# Altium PCB MCD V1.00 R.00.PcbDoc (part 3 of 3)
Units mm, origin at the board's own origin, x right, y up, seen from the top; angles counter-clockwise.
Board outline 257.5 x 162.5 mm, 2 copper layers (Top Layer, Bottom Layer); 260 components, 165 nets, 831 pads, 233 vias.
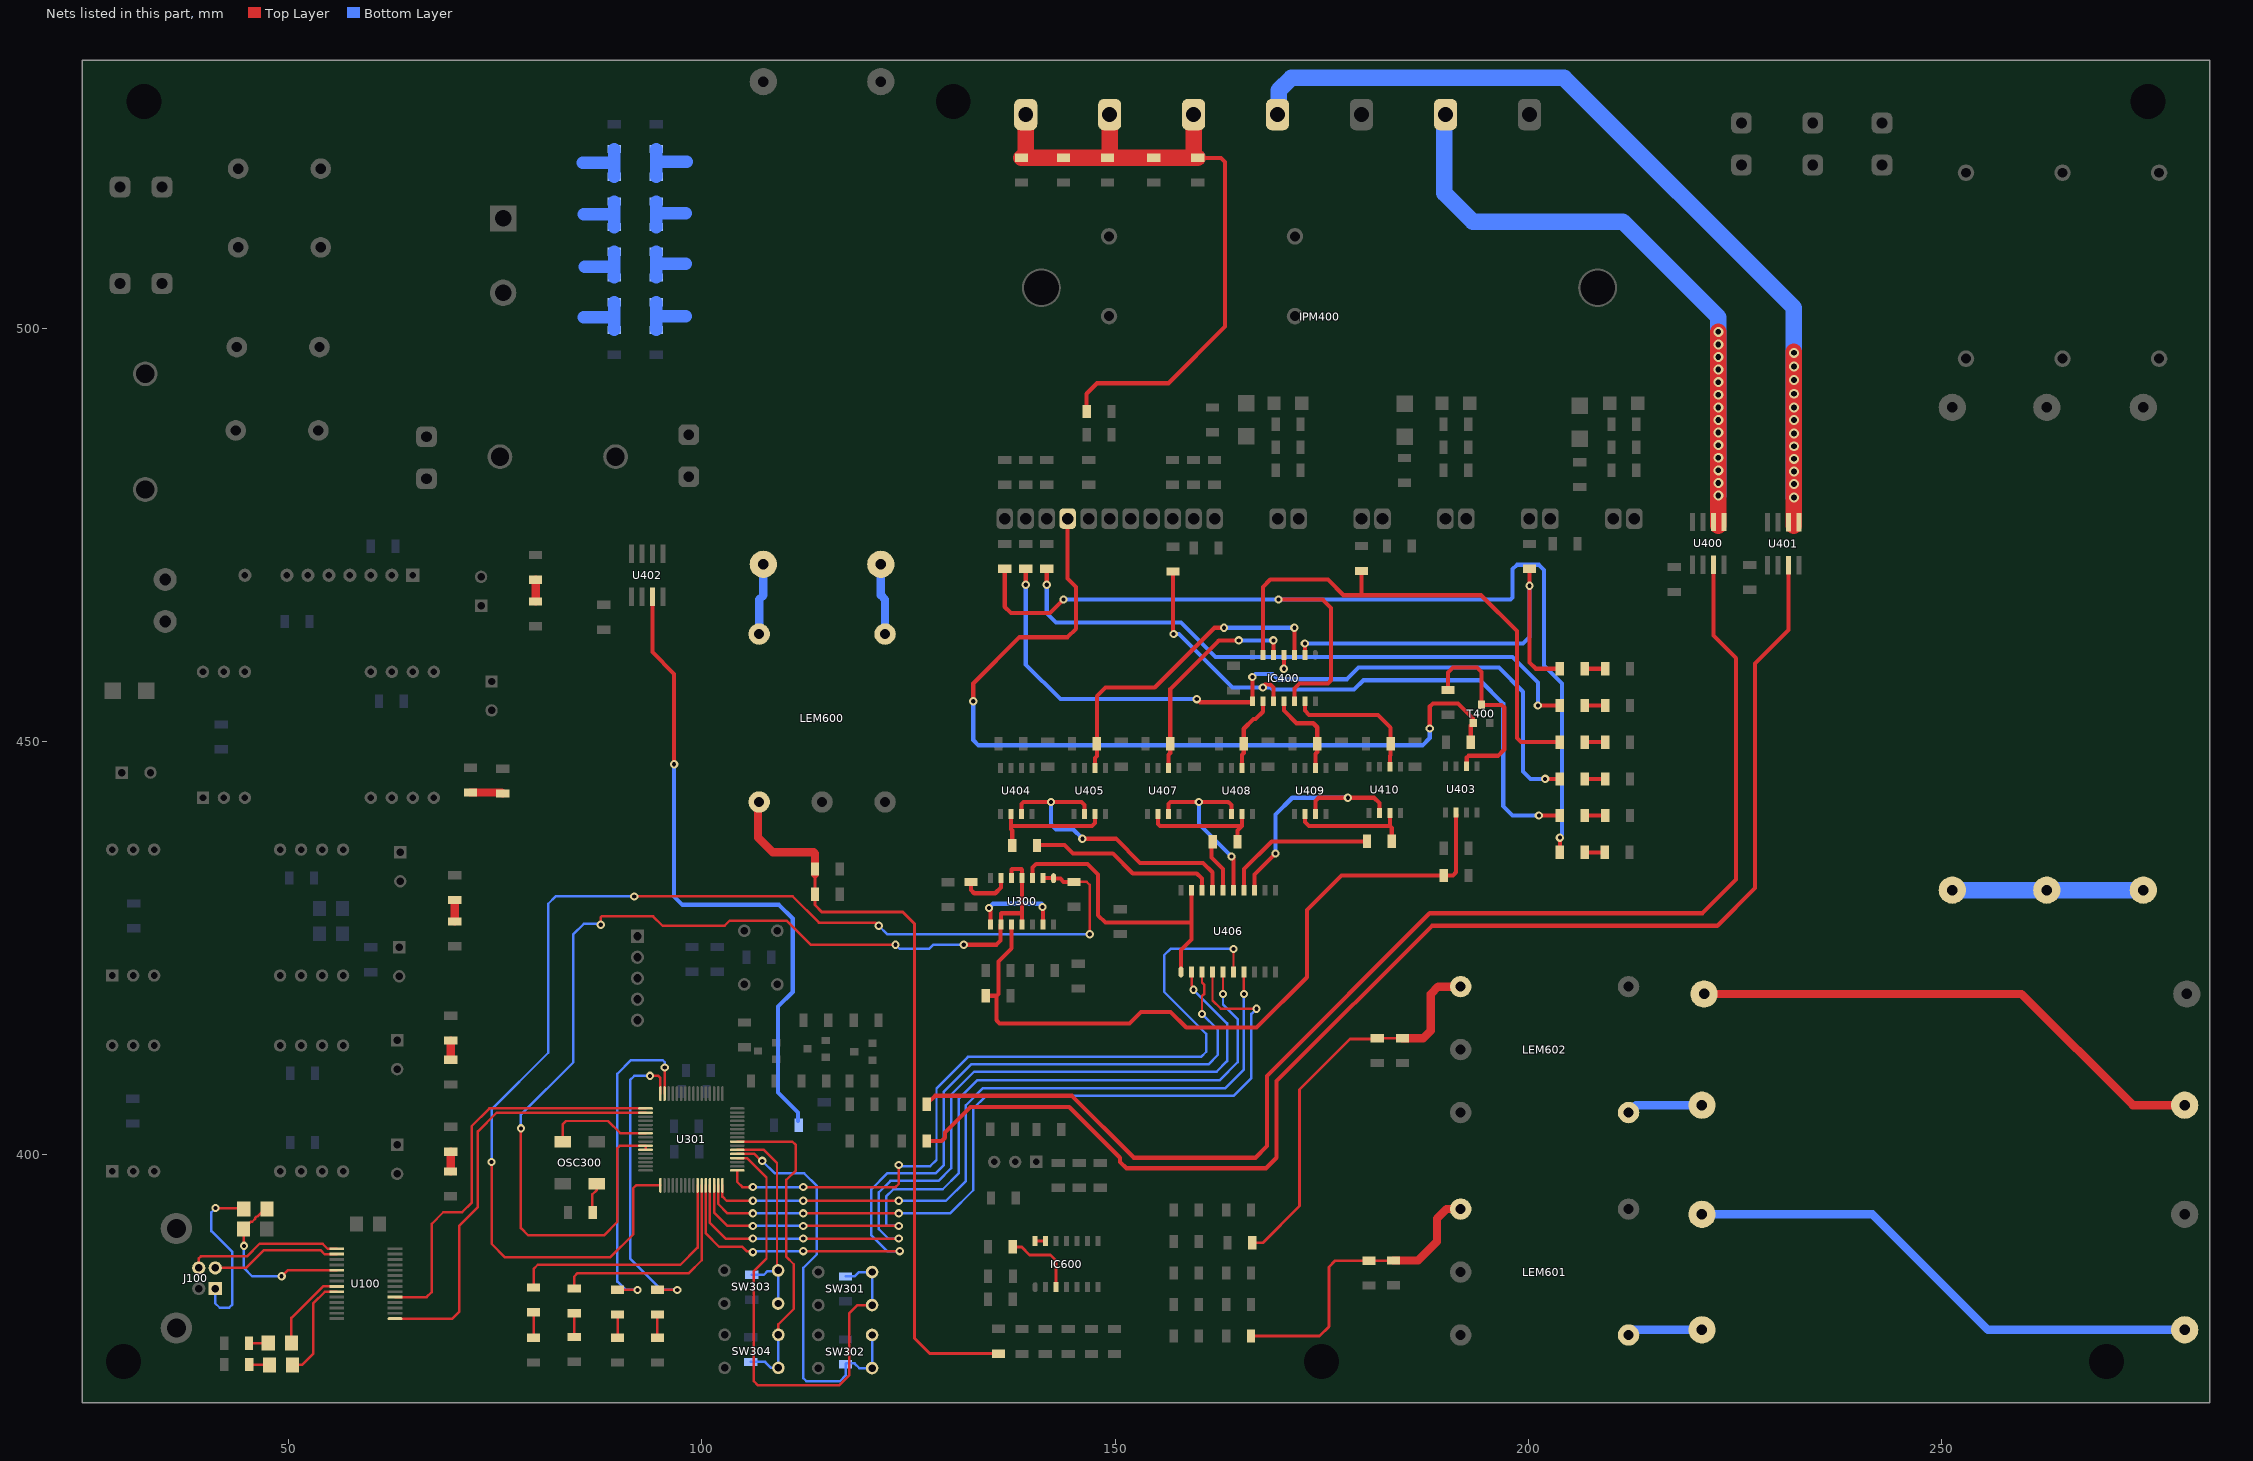
[diagram p3: the nets of this part, all layers, seen from the top]

## Via types
v1: diameter 1, hole 0.5, Top Layer to Bottom Layer, 192 vias
v2: diameter 1.2, hole 0.7, Top Layer to Bottom Layer, 26 vias
v3: diameter 1.27, hole 0.711, Top Layer to Bottom Layer, 15 vias

## Nets (pads, with @x,y where several pads share a name; then routed paths per layer and width w, separated by ;. In a path a pad name is that pad's centre, name@x,y a point inside that pad or via, vN(x,y) a via of type N, cw(c..) or ccw(c..) an arc to the next point about the centre after c; other vN are vias at no path point) (continued)
NetIC400_2: IC400.2 R417.1 R418.1 | length 50.4
  Top Layer w0.5: IC400.2@172.974,460.514 v1(172.974,461.899) ; R417.1@200.152,470.94 v1(200.152,468.884) 200.152,459.613 200.914,458.851 R418.1@203.835,458.851
  Bottom Layer w0.5: v1(172.974,461.899) 199.39,461.899 200.152,462.661 v1(200.152,468.884)
NetIC400_3: IC400.3 R419.1 U405.6 | length 39.4
  Top Layer w0.5: U405.6@147.57,446.853 147.57,448.052 147.8,448.282 R419.1@147.8,449.768 147.8,455.521 148.844,456.565 154.813,456.565 162.052,463.804 v1(163.195,463.804) ; IC400.3@171.704,460.514 v1(171.704,463.804)
  Bottom Layer w0.5: v1(163.195,463.804) v1(171.704,463.804)
NetIC400_4: IC400.4 R420.1 R421.1 | length 76.8
  Top Layer w0.5: v1(141.732,469.011) R420.1@141.732,470.94 ; v1(170.434,458.851) IC400.4@170.434,460.514 ; v1(201.168,454.406) R421.1@203.835,454.406
  Bottom Layer w0.5: v1(141.732,469.011) 141.732,465.582 142.875,464.439 157.988,464.439 162.179,460.248 170.434,460.248 ; v1(170.434,458.851) 170.434,460.248 ; v1(201.168,454.406) 201.168,457.2 198.12,460.248 170.434,460.248
NetIC400_5: IC400.5 R422.1 U407.6 | length 26.3
  Top Layer w0.5: U407.6@156.46,446.853 156.46,448.433 156.69,448.663 R422.1@156.69,449.768 156.69,456.41 162.56,462.28 v1(164.973,462.28) ; IC400.5@169.164,460.514 v1(169.164,462.28)
  Bottom Layer w0.5: v1(164.973,462.28) v1(169.164,462.28)
NetIC400_6: IC400.6 R424.1 R425.1 | length 63.3
  Top Layer w0.5: IC400.6@167.894,460.514 167.894,468.757 168.783,469.646 175.768,469.646 177.673,467.741 179.705,467.741 ; R424.1@179.832,470.686 179.832,467.868 179.705,467.741 ; R425.1@203.835,449.961 199.136,449.961 198.628,450.469 198.628,463.423 194.31,467.741 179.705,467.741
NetIC400_8: IC400.8 R427.1 R428.1 | length 93.3
  Top Layer w0.5: v1(139.192,469.011) R427.1@139.192,470.94 ; v1(159.893,455.168) 160.274,454.787 166.497,454.787 IC400.8@166.624,454.914 v1(166.624,457.835) ; v1(202.057,445.516) R428.1@203.835,445.516
  Bottom Layer w0.5: v1(139.192,469.011) 139.192,459.359 143.383,455.168 v1(159.893,455.168) ; v1(166.624,457.835) 167.005,458.216 169.037,458.216 169.672,457.581 178.054,457.581 179.451,458.978 196.469,458.978 199.39,456.057 199.39,446.405 200.279,445.516 v1(202.057,445.516)
NetIC400_9: IC400.9 R426.1 U408.6 | length 9.3
  Top Layer w0.5: U408.6@165.35,446.853 165.35,448.433 165.58,448.663 R426.1@165.58,449.768 165.58,451.584 166.751,452.755 167.005,452.755 167.894,453.644 IC400.9@167.894,454.914
NetIC400_10: IC400.10 R431.1 R432.1 | length 75
  Top Layer w0.5: R431.1@157.032,470.603 157.032,463.109 v1(157.099,463.042) ; v1(167.894,456.565) 167.894,456.692 168.148,456.946 168.783,456.946 169.164,456.565 IC400.10@169.164,454.914 ; v1(201.295,441.071) R432.1@203.835,441.071
  Bottom Layer w0.5: v1(157.099,463.042) 157.734,463.042 164.211,456.565 v1(167.894,456.565) 168.783,456.565 169.037,456.311 178.943,456.311 180.086,457.454 194.183,457.454 196.977,454.66 196.977,442.214 198.12,441.071 v1(201.295,441.071)
NetIC400_11: IC400.11 R429.1 U409.6 | length 11
  Top Layer w0.5: IC400.11@170.434,454.914 170.434,453.771 171.958,452.247 173.99,452.247 174.47,451.767 R429.1@174.47,449.768 174.47,448.79 174.24,448.56 U409.6@174.24,446.853
NetIC400_12: IC400.12 R434.1 R435.1 | length 132
  Top Layer w0.5: R434.1@136.652,470.94 136.652,466.344 137.414,465.582 142.113,465.582 v1(143.764,467.233) ; v1(169.799,467.233) 175.133,467.233 176.149,466.217 176.149,457.454 175.768,457.073 172.339,457.073 171.704,456.438 IC400.12@171.704,454.914 ; R435.1@203.835,436.626 v1(203.835,438.404)
  Bottom Layer w0.5: v1(143.764,467.233) v1(169.799,467.233) 197.866,467.233 198.12,467.487 198.12,470.916 198.628,471.424 201.295,471.424 201.93,470.789 201.93,459.232 204.089,457.073 204.089,438.785 203.835,438.531 v1(203.835,438.404)
NetIC400_13: IC400.13 R433.1 U410.6 | length 17.2
  Top Layer w0.5: IC400.13@172.974,454.914 172.974,453.771 173.482,453.263 181.809,453.263 183.36,451.711 R433.1@183.36,449.768 183.36,448.409 183.261,448.31 183.261,446.984 U410.6@183.257,446.98
NetIC600_3: IC600.3 R608.1 | length 9.1
  Top Layer w0.35: R608.1@137.64,388.887 138.671,388.887 139.659,387.899 142.199,387.899 142.875,387.223 IC600.3@142.875,383.999
NetIC600_13: IC600.13 IC600.14 | length 1.3
  Top Layer w0.35: IC600.14@140.335,389.599 IC600.13@141.605,389.599
NetIPM400_18: IPM400.18 R411.1 T400.1 | length 104.6
  Top Layer w0.5: v1(132.842,454.914) 132.842,457.073 138.43,462.661 144.272,462.661 145.288,463.677 145.288,468.757 144.272,469.773 IPM400.18@144.272,477.012 ; v1(188.087,451.612) 188.087,454.279 188.468,454.66 191.516,454.66 193.335,452.841 T400.1@193.335,452.269 193.057,451.991 R411.1@193.057,449.96
  Bottom Layer w0.5: v1(132.842,454.914) 132.842,450.215 133.477,449.58 187.198,449.58 188.087,450.469 v1(188.087,451.612)
NetIPM400_23: IPM400.23 U400.1 U400.2 | length 94
  Top Layer w2: 223.012,476.123 v2(223.012,479.806) v2(223.012,481.33) v2(223.012,482.854) v2(223.012,484.378) v2(223.012,485.902) v2(223.012,487.426) v2(223.012,488.95) v2(223.012,490.474) v2(223.012,491.998) v2(223.012,493.522) v2(223.012,495.046) v2(223.012,496.57) v2(223.012,498.094) v2(223.012,499.618)
  Bottom Layer w2: IPM400.23@189.992,525.907 189.865,525.78 189.865,516.382 193.294,512.953 211.455,512.953 223.012,501.396 v2(223.012,499.618) v2(223.012,498.094) v2(223.012,496.57) v2(223.012,495.046) v2(223.012,493.522) v2(223.012,491.998) v2(223.012,490.474) v2(223.012,488.95) v2(223.012,487.426) v2(223.012,485.902) v2(223.012,484.378) v2(223.012,482.854) v2(223.012,481.33) v2(223.012,479.806)
NetIPM400_25: IPM400.25 U401.1 U401.2 | length 121.6
  Top Layer w2: 232.156,476.123 v2(232.156,479.552) v2(232.156,481.203) v2(232.156,482.727) v2(232.156,484.251) v2(232.156,485.775) v2(232.156,487.299) v2(232.156,488.95) v2(232.156,490.474) v2(232.156,492.125) v2(232.156,493.776) v2(232.156,495.427) v2(232.156,497.078) v2@232.156,497.205
  Bottom Layer w2: IPM400.25@169.672,525.907 169.799,526.034 169.799,528.828 171.323,530.352 204.343,530.352 232.156,502.539 v2(232.156,497.078) v2(232.156,495.427) v2(232.156,493.776) v2(232.156,492.125) v2(232.156,490.474) v2(232.156,488.95) v2(232.156,487.299) v2(232.156,485.775) v2(232.156,484.251) v2(232.156,482.727) v2(232.156,481.203) v2(232.156,479.552)
NetIPM400_26: IPM400.26 IPM400.27 IPM400.28 R403.2 R406.2 R407.2 R408.2 R409.2 R410.2 | length 83.3
  Top Layer w0.5: R403.2@146.582,489.966 146.558,489.99 146.558,492.125 147.828,493.395 156.464,493.395 163.322,500.253 163.322,520.192 162.838,520.676 R409.2@160.02,520.676
  Top Layer w2: IPM400.28@139.192,525.907 139.192,521.184 R410.2@138.684,520.676 R406.2@143.764,520.676 R407.2@149.098,520.676 ; IPM400.27@149.352,525.907 149.352,520.93 R407.2@149.098,520.676 ; IPM400.26@159.512,525.907 159.512,521.184 R409.2@160.02,520.676 R408.2@154.686,520.676 R407.2@149.098,520.676
NetJ100_1: J100.1 R100.2 | length 20.7
  Top Layer w0.3: v1(41.148,393.573) 44.447,393.573 R100.2@44.574,393.446
  Bottom Layer w0.3: J100.1@41.116,383.834 41.116,382.048 41.656,381.508 42.799,381.508 43.18,381.889 43.18,388.239 40.64,390.779 40.64,393.065 v1(41.148,393.573)
NetJ100_2: J100.2 U100.16 | length 15.8
  Top Layer w0.3: J100.2@41.116,386.334 44.831,386.334 46.99,388.493 53.848,388.493 54.356,387.985 55.805,387.985 U100.16@55.819,387.999
NetJ100_3: J100.3 U100.15 | length 19
  Top Layer w0.3: J100.3@39.116,386.334 39.116,387.477 39.37,387.731 41.656,387.731 ; 41.783,387.731 41.656,387.731 ; U100.15@55.819,388.649 54.708,388.649 54.102,389.255 46.482,389.255 44.958,387.731 41.656,387.731
NetLED500_A: LED500.A R500.1 | length 2.3
  Top Layer w1: LED500.A@69.617,411.533 R500.1@69.617,413.843
NetLED501_K: LED501.K R501.1 | length 2.4
  Top Layer w1: R501.1@69.596,397.994 69.617,398.015 LED501.K@69.617,400.405
NetLED502_A: LED502.A R502.2 | length 2.6
  Top Layer w1: LED502.A@70.109,428.249 R502.2@70.109,430.861
NetLED503_A: LED503.A R503.2 | length 4
  Top Layer w1: R503.2@72.009,443.865 75.787,443.865 LED503.A@75.914,443.738
NetLED504_A: LED504.A R504.2 | length 2.6
  Top Layer w1: R504.2@79.883,466.979 LED504.A@79.883,469.615
NetLEM600_1: LEM600.1 R601.1 | length 8.6
  Bottom Layer w1: R601.1@121.661,471.478 121.661,467.746 122.174,467.233 LEM600.1@122.174,463.042
NetLEM600_2: LEM600.2 R606.1 | length 8.6
  Bottom Layer w1: LEM600.2@106.934,463.042 106.934,467.233 107.437,467.736 R606.1@107.437,471.478
NetLEM600_3: LEM600.3 R603.1 R607.1 R627.1 | length 93
  Top Layer w0.35: R607.1@113.689,434.594 R627.1@113.689,431.546 113.689,430.252 114.554,429.387 124.333,429.387 125.73,427.99 125.73,377.825 127.598,375.957 R603.1@135.886,375.957
  Top Layer w1: LEM600.3@106.934,442.722 106.807,442.595 106.807,438.404 108.585,436.626 113.538,436.626 113.689,436.475 R607.1@113.689,433.959
NetLEM601_1: LEM601.1 R611.1 | length 9.1
  Bottom Layer w1: LEM601.1@212.149,378.211 212.784,378.846 R611.1@221.034,378.846
NetLEM601_3: LEM601.3 R612.1 R615.1 R628.1 | length 37.6
  Top Layer w0.35: R612.1@166.469,378.092 174.765,378.092 175.895,379.222 175.895,386.461 176.633,387.199 R628.1@180.721,387.199 183.672,387.199 R615.1@183.701,387.228
  Top Layer w1: R615.1@183.701,387.228 186.695,387.228 188.976,389.509 188.976,392.303 190.124,393.451 LEM601.3@191.829,393.451
NetLEM602_1: LEM602.1 R620.1 | length 9.3
  Bottom Layer w1: LEM602.1@212.149,405.135 213.038,406.024 R620.1@221.034,406.024
NetLEM602_3: LEM602.3 R621.1 R624.1 R629.1 | length 48.9
  Top Layer w0.35: R621.1@166.6,389.382 167.894,389.382 172.339,393.827 172.339,407.924 178.435,414.02 181.634,414.02 R629.1@181.737,414.123 R624.1@184.785,414.123
  Top Layer w1: R624.1@184.785,414.123 187.301,414.123 188.214,415.036 188.214,419.481 189.108,420.375 LEM602.3@191.829,420.375
NetOSC300_1: OSC300.1 R301.2 | length 3.7
  Top Layer w0.3: R301.2@86.793,393.053 86.741,393.105 86.741,395.224 87.294,395.777 OSC300.1@87.294,396.527
NetOSC300_3: OSC300.3 U301.39 | length 12.9
  Top Layer w0.3: OSC300.3@83.167,401.607 83.185,401.625 83.185,403.733 83.566,404.114 88.646,404.114 90.132,402.628 U301.39@93.184,402.628
NetPWM_UN_A: PWM_UN.A R421.2 | length 2.5
  Top Layer w0.5: R421.2@206.835,454.406 PWM_UN.A@209.32,454.406
NetPWM_UP_A: PWM_UP.A R418.2 | length 2.5
  Top Layer w0.5: R418.2@206.835,458.851 PWM_UP.A@209.32,458.851
NetPWM_VN_A: PWM_VN.A R428.2 | length 2.5
  Top Layer w0.5: R428.2@206.835,445.516 PWM_VN.A@209.32,445.516
NetPWM_VP_A: PWM_VP.A R425.2 | length 2.5
  Top Layer w0.5: R425.2@206.835,449.961 PWM_VP.A@209.32,449.961
NetPWM_WN_A: PWM_WN.A R435.2 | length 2.4
  Top Layer w0.5: R435.2@206.835,436.626 PWM_WN.A@209.272,436.626
NetPWM_WP_A: PWM_WP.A R432.2 | length 2.3
  Top Layer w0.5: R432.2@207.01,441.071 PWM_WP.A@209.32,441.071
NetR100_1: R100.1 R103.2 U100.19 | length 20.6
  Top Layer w0.3: v1(44.577,389.001) 44.577,391.002 R103.2@44.539,391.04 45.421,391.922 45.593,391.922 45.974,392.303 45.974,392.43 46.101,392.557 46.228,392.557 47.117,393.446 R100.1@47.374,393.446 ; v1(49.149,385.318) 49.911,386.08 55.788,386.08 U100.19@55.819,386.049
  Bottom Layer w0.3: v1(44.577,389.001) 44.577,386.334 45.593,385.318 v1(49.149,385.318)
NetR101_1: R101.1 U100.23 | length 12.6
  Top Layer w0.3: R101.1@50.465,374.587 51.626,374.587 52.959,375.92 52.959,382.016 54.392,383.449 U100.23@55.819,383.449
NetR101_2: R101.2 TX_LED100.K | length 2.3
  Top Layer w0.3: TX_LED100.K@45.323,374.603 47.649,374.603 R101.2@47.665,374.587
NetR102_1: R102.1 U100.22 | length 10.1
  Top Layer w0.3: R102.1@50.338,377.254 50.338,380.284 54.153,384.099 U100.22@55.819,384.099
NetR102_2: R102.2 RX_LED100.K | length 2.4
  Top Layer w0.3: RX_LED100.K@45.196,377.216 47.5,377.216 R102.2@47.538,377.254
NetR303_2: R303.2 R413.1 U300.10 U403.6 | length 90.2
  Top Layer w0.5: R303.2@134.36,419.265 135.674,419.265 ; 135.89,419.481 135.674,419.265 ; 135.89,419.608 135.89,423.418 137.484,425.012 U300.10@137.484,427.9 ; U403.6@191.298,441.127 191.262,441.091 191.262,434.213 190.881,433.832 R413.1@189.786,433.832 177.419,433.832 173.228,429.641 173.228,421.513 167.132,415.417 158.623,415.417 156.718,417.322 153.162,417.322 151.765,415.925 136.017,415.925 135.636,416.306 135.636,419.227 135.674,419.265
NetR305_1: R305.1 U300.1 U300.2 U301.49 | length 151.7
  Top Layer w0.3: v1(74.549,399.161) 74.549,389.255 76.2,387.604 88.9,387.604 91.694,390.398 91.694,395.986 92.036,396.328 U301.49@94.984,396.328 ; v1(91.821,431.292) 110.998,431.292 114.173,428.117 121.031,428.117 v1(121.412,427.736) ; R305.1@145.034,433.046 146.582,433.046 146.939,432.689 v1(146.939,426.72)
  Top Layer w0.5: U300.2@141.294,433.5 U300.1@142.564,433.5 142.613,433.451 143.383,433.451 143.788,433.046 R305.1@145.034,433.046
  Bottom Layer w0.3: v1(74.549,399.161) 74.549,405.511 81.407,412.369 81.407,430.403 82.296,431.292 v1(91.821,431.292) ; v1(121.412,427.736) 122.428,426.72 v1(146.939,426.72)
NetR306_2: R306.2 SW301.2 U301.4 | length 60.1
  Top Layer w0.3: U301.4@104.284,399.628 105.451,399.628 107.823,397.256 107.823,387.477 106.299,385.953 106.299,372.618 106.807,372.11 116.586,372.11 117.856,373.38 117.856,380.873 118.819,381.836 SW301.2@120.597,381.836
  Bottom Layer w0.3: R306.2@117.399,385.304 118.477,385.304 118.999,385.826 120.587,385.826 SW301.2@120.597,385.836 SW301.2@120.597,381.836
NetR307_2: R307.2 SW302.2 U301.5 | length 49.6
  Top Layer w0.3: U301.5@104.284,400.128 106.348,400.128 107.188,399.288 v1(107.315,399.288)
  Bottom Layer w0.3: v1(107.315,399.288) 108.839,397.764 112.395,397.764 113.919,396.24 113.919,387.985 112.268,386.334 112.268,372.999 112.649,372.618 116.713,372.618 117.399,373.304 R307.2@117.399,374.684 117.492,374.777 118.491,374.777 119.052,374.216 SW302.2@120.597,374.216 SW302.2@120.597,378.216
NetR308_2: R308.2 SW303.2 U301.6 | length 26
  Top Layer w0.3: U301.6@104.284,400.628 107.499,400.628 109.093,399.034 109.093,386.163 SW303.2@109.23,386.026
  Bottom Layer w0.3: R308.2@106.032,385.494 107.491,385.494 107.95,385.953 109.157,385.953 SW303.2@109.23,386.026 SW303.2@109.23,382.026
NetR309_2: R309.2 SW304.2 U301.8 | length 39.5
  Top Layer w0.3: U301.8@104.284,401.628 110.944,401.628 111.379,401.193 111.379,398.145 110.236,397.002 110.236,387.667 111.125,386.779 111.125,381.381 109.262,379.518 SW304.2@109.262,378.24
  Bottom Layer w0.3: R309.2@105.918,374.952 107.648,374.952 108.36,374.24 SW304.2@109.262,374.24 SW304.2@109.262,378.24
NetR310_1: R310.1 UL_300.A | length 2.8
  Top Layer w0.3: UL_300.A@94.624,377.888 R310.1@94.624,380.706
NetR310_2: R310.2 U301.32 | length 37.2
  Top Layer w0.3: v1(93.726,409.575) 94.742,409.575 94.984,409.333 U301.32@94.984,407.428 ; R310.2@94.624,383.706 94.663,383.667 v1(97.028,383.667)
  Bottom Layer w0.3: v1(93.726,409.575) 91.821,409.575 91.313,409.067 91.313,387.477 95.123,383.667 v1(97.028,383.667)
NetR311_1: R311.1 UL_301.A | length 2.8
  Top Layer w0.3: UL_301.A@89.798,377.888 R311.1@89.798,380.706
NetR311_2: R311.2 U301.31 | length 40.7
  Top Layer w0.3: R311.2@89.798,383.706 89.837,383.667 v1(92.202,383.667) ; U301.31@95.484,407.428 95.484,410.571 v1(95.504,410.591)
  Bottom Layer w0.3: v1(92.202,383.667) 90.805,383.667 89.789,384.683 89.789,409.829 91.44,411.48 95.25,411.48 95.504,411.226 v1(95.504,410.591)
NetR312_1: R312.1 UL_302.A | length 2.9
  Top Layer w0.3: UL_302.A@84.559,377.967 R312.1@84.559,380.833
NetR312_2: R312.2 U301.59 | length 26.8
  Top Layer w0.3: R312.2@84.559,383.833 84.559,385.295 84.963,385.699 98.425,385.699 99.984,387.258 U301.59@99.984,396.328
NetR313_1: R313.1 UL_303.A | length 3.1
  Top Layer w0.3: UL_303.A@79.638,377.888 R313.1@79.638,380.96
NetR313_2: R313.2 U301.58 | length 30.7
  Top Layer w0.3: R313.2@79.638,383.96 79.638,386.216 80.137,386.715 97.409,386.715 99.484,388.79 U301.58@99.484,396.328
NetR314_2: R314.2 U300.6 | length 6.2
  Top Layer w0.5: R314.2@132.588,433.046 132.588,432.054 132.969,431.673 135.509,431.673 136.214,432.378 U300.6@136.214,433.5
NetR400_1: R400.1 U400.7 | length 159.7
  Top Layer w0.5: R400.1@127.206,406.146 128.222,407.162 144.78,407.162 152.273,399.669 167.005,399.669 168.402,401.066 168.402,409.575 188.087,429.26 221.107,429.26 225.171,433.324 225.171,460.121 222.422,462.87 U400.7@222.422,471.421
NetR401_1: R401.1 U401.7 | length 165.9
  Top Layer w0.5: R401.1@127.206,401.701 129.032,401.701 129.413,402.082 129.413,402.717 132.524,405.828 144.463,405.828 150.622,399.669 150.622,399.161 151.384,398.399 168.275,398.399 169.545,399.669 169.545,408.94 188.341,427.736 222.885,427.736 227.457,432.308 227.457,459.486 231.521,463.55 U401.7@231.521,471.364
NetR412_1: R412.1 T400.3 U403.2 | length 24.9
  Top Layer w0.5: R412.1@190.287,456.286 190.287,458.384 190.881,458.978 193.802,458.978 194.351,458.429 T400.3@194.351,454.479 196.777,454.479 197.104,454.152 197.104,449.072 196.342,448.31 192.786,448.31 192.568,448.092 U403.2@192.568,446.727
NetR414_1: R414.1 U402.7 | length 79.1
  Top Layer w0.5: U402.7@94.012,467.559 94.012,460.851 96.647,458.216 v1(96.647,447.294)
  Bottom Layer w0.5: v1(96.647,447.294) 96.647,431.292 97.663,430.276 109.347,430.276 110.998,428.625 110.998,419.735 109.22,417.957 109.22,407.543 111.633,405.13 R414.1@111.633,404.114
NetR416_1: R416.1 U406.18 | length 23.1
  Top Layer w0.5: R416.1@140.561,437.449 140.627,437.515 143.891,437.515 144.907,436.499 149.733,436.499 152.146,434.086 159.893,434.086 160.528,433.451 U406.18@160.528,432.048
NetR416_2: R416.2 U404.2 U405.3 | length 15.3
  Top Layer w0.5: U404.2@137.41,441.253 137.41,439.801 ; R416.2@137.561,437.449 137.561,439.273 137.41,439.424 137.41,439.801 ; U405.3@147.57,441.253 147.57,440.178 147.193,439.801 137.41,439.801
NetR423_1: R423.1 U406.16 | length 6.5
  Top Layer w0.5: R423.1@161.822,437.896 161.671,437.745 161.671,435.991 163.068,434.594 U406.16@163.068,432.048
NetR423_2: R423.2 U407.2 U408.3 | length 15
  Top Layer w0.5: U407.2@155.19,441.253 155.19,440.059 155.452,439.797 165.35,439.797 ; R423.2@164.822,437.896 164.822,439.269 165.35,439.797 ; U408.3@165.35,441.253 165.35,439.797
NetR430_1: R430.1 U406.14 | length 18.8
  Top Layer w0.5: U406.14@165.608,432.048 165.608,434.594 168.971,437.957 R430.1@180.487,437.957
NetR430_2: R430.2 U409.2 U410.3 | length 15
  Top Layer w0.5: U409.2@172.97,441.253 172.97,440.313 173.478,439.805 183.257,439.805 ; U410.3@183.257,441.38 183.257,439.805 ; R430.2@183.487,437.957 183.487,439.575 183.257,439.805
NetR436_2: R436.2 R437.2 R438.2 | length 23.1
  Bottom Layer w2: R436.2@251.333,432.054 R437.2@262.763,432.054 R438.2@274.447,432.054
NetR610_1: R610.1 R611.2 | length 64.2
  Bottom Layer w1: R610.1@221.034,392.816 241.676,392.816 255.646,378.846 R611.2@279.454,378.846
NetR619_1: R619.1 R620.2 | length 63.7
  Top Layer w1: R619.1@221.288,419.486 259.71,419.486 273.172,406.024 R620.2@279.454,406.024
NetR700_2: R700.2 R702.1 | length 6.9
  Bottom Layer w1.5: R700.2@94.488,499.848 94.488,501.523 ; R702.1@94.488,503.198 94.488,501.523 ; 98.044,501.523 94.488,501.523
NetR701_2: R701.2 R703.1 | length 7
  Bottom Layer w1.5: 85.725,501.396 89.408,501.396 ; R701.2@89.408,499.848 89.408,501.396 ; R703.1@89.408,503.198 89.408,501.396
NetR702_2: R702.2 R704.1 | length 6.7
  Bottom Layer w1.5: R702.2@94.488,506.198 94.488,507.873 ; R704.1@94.488,509.294 94.488,507.873 ; 98.044,507.873 94.488,507.873
NetR703_2: R703.2 R705.1 | length 6.7
  Bottom Layer w1.5: 85.852,507.492 89.408,507.492 ; R703.2@89.408,506.198 89.408,507.492 ; R705.1@89.408,509.294 89.408,507.492
NetR704_2: R704.2 R706.1 | length 6.7
  Bottom Layer w1.5: R704.2@94.488,512.294 94.488,513.969 ; R706.1@94.488,515.39 94.488,513.969 ; 98.044,513.969 94.488,513.969
NetR705_2: R705.2 R707.1 | length 6.8
  Bottom Layer w1.5: 85.725,513.842 89.408,513.842 ; R705.2@89.408,512.294 89.408,513.842 ; R707.1@89.408,515.39 89.408,513.842
NetR706_2: R706.2 R708.1 | length 7
  Bottom Layer w1.5: R706.2@94.488,518.39 94.488,520.192 ; R708.1@94.488,521.74 94.488,520.192 ; 98.171,520.192 94.488,520.192
NetR707_2: R707.2 R709.1 | length 7.2
  Bottom Layer w1.5: 85.598,520.065 89.408,520.065 ; R707.2@89.408,518.39 89.408,520.065 ; R709.1@89.408,521.74 89.408,520.065
NetU100_1: U100.1 U301.34 | length 52.1
  Top Layer w0.3: U100.1@62.869,380.199 69.811,380.199 70.612,381 70.612,391.414 72.898,393.7 72.898,402.844 75.182,405.128 U301.34@93.184,405.128
NetU100_5: U100.5 U301.33 | length 50
  Top Layer w0.3: U100.5@62.869,382.799 66.696,382.799 67.31,383.413 67.31,391.668 68.707,393.065 70.993,393.065 72.136,394.208 72.136,403.479 74.285,405.628 U301.33@93.184,405.628
NetU300_3: U300.3 U406.1 U406.19 | length 39.5
  Top Layer w0.5: U300.3@140.024,433.5 140.024,434.791 140.462,435.229 146.685,435.229 147.955,433.959 147.955,429.006 148.844,428.117 159.258,428.117 U406.19@159.258,432.048 ; U406.1@157.988,422.148 157.988,424.815 159.258,426.085 159.258,430.657
NetU300_4: U300.4 U300.5 U300.9 U300.11 U301.42 U301.43 | length 134.5
  Top Layer w0.3: v1(78.105,403.225) 78.105,391.16 78.994,390.271 88.138,390.271 89.789,391.922 89.789,400.812 90.105,401.128 U301.42@93.184,401.128 U301.43@93.184,400.628 ; v1(87.757,427.863) 87.757,428.752 87.884,428.879 94.107,428.879 95.25,427.736 102.743,427.736 103.378,428.371 110.236,428.371 113.157,425.45 v1(123.444,425.45)
  Top Layer w0.5: v1(131.699,425.45) 135.636,425.45 136.144,425.958 136.144,427.83 U300.9@136.214,427.9 136.214,429.203 136.271,429.26 138.684,429.26 138.754,429.19 ; U300.5@137.484,433.5 137.484,434.537 137.541,434.594 138.684,434.594 138.754,434.524 U300.4@138.754,433.5 138.754,429.19 ; U300.11@138.754,427.9 138.754,429.19
  Bottom Layer w0.3: v1(78.105,403.225) 78.105,404.876 84.455,411.226 84.455,426.72 85.725,427.99 87.63,427.99 v1(87.757,427.863) ; v1(123.444,425.45) 123.952,424.942 127.508,424.942 128.016,425.45 v1(131.699,425.45)
NetU300_8: U300.8 U300.13 | length 11.2
  Top Layer w0.5: v1(134.747,429.895) 134.944,429.698 U300.8@134.944,427.9 ; v1(141.224,430.022) 141.294,429.952 U300.13@141.294,427.9
  Bottom Layer w0.5: v1(134.747,429.895) 135.255,430.403 141.097,430.403 141.224,430.276 v1(141.224,430.022)
NetU301_1: U301.1 U406.6 | length 97
  Top Layer w0.3: U301.1@104.284,398.128 104.284,396.731 104.902,396.113 v1(106.172,396.113) ; v1(112.268,396.113) 123.444,396.113 123.825,396.494 v1(123.825,398.78) ; U406.6@164.338,422.148 v1(164.338,424.942)
  Bottom Layer w0.3: v1(106.172,396.113) v1(112.268,396.113) ; v1(123.825,398.78) 123.952,398.653 127.635,398.653 128.397,399.415 128.397,408.051 132.207,411.861 160.401,411.861 161.036,412.496 161.036,414.655 155.956,419.735 155.956,424.18 156.718,424.942 v1(164.338,424.942)
NetU301_60: U301.60 U406.3 | length 105
  Top Layer w0.3: U301.60@100.484,396.328 100.484,390.498 102.108,388.874 104.902,388.874 105.41,388.366 106.045,388.366 v1(106.172,388.239) ; v1(112.268,388.366) v1(123.952,388.366) ; v1(160.528,417.068) 160.528,419.227 160.782,419.481 160.782,420.624 160.528,420.878 U406.3@160.528,422.148
  Bottom Layer w0.3: v1(106.172,388.239) 106.299,388.366 v1(112.268,388.366) ; v1(123.952,388.366) 122.428,388.366 120.523,390.271 120.523,395.859 122.428,397.764 128.27,397.764 129.286,398.78 129.286,407.67 132.588,410.972 161.29,410.972 162.433,412.115 162.433,415.163 v1(160.528,417.068)
NetU301_61: U301.61 U406.2 | length 102
  Top Layer w0.3: U301.61@100.984,396.328 100.984,391.776 102.87,389.89 v1(106.172,389.89) ; v1(112.268,389.89) v1(123.825,389.89) ; U406.2@159.258,422.148 159.258,420.497 159.512,420.243 v1(159.512,419.989)
  Bottom Layer w0.3: v1(106.172,389.89) v1(112.268,389.89) ; v1(123.825,389.89) 122.555,389.89 121.412,391.033 121.412,395.478 122.809,396.875 128.651,396.875 130.175,398.399 130.175,407.289 132.969,410.083 162.306,410.083 163.576,411.353 163.576,415.925 v1(159.512,419.989)
NetU301_62: U301.62 U406.5 | length 97.5
  Top Layer w0.3: U301.62@101.484,396.328 101.484,393.054 103.124,391.414 v1(106.172,391.414) ; v1(112.268,391.414) v1(123.825,391.414) ; v1(163.068,419.481) U406.5@163.068,422.148
  Bottom Layer w0.3: v1(106.172,391.414) v1(112.268,391.414) ; v1(123.825,391.414) 122.428,391.414 122.301,391.541 122.301,394.97 123.19,395.859 129.159,395.859 131.064,397.764 131.064,406.781 133.35,409.067 162.687,409.067 164.846,411.226 164.846,416.433 163.068,418.211 v1(163.068,419.481)
NetU301_63: U301.63 U406.4 | length 97.7
  Top Layer w0.3: U301.63@101.984,396.328 101.984,394.078 103.124,392.938 v1(106.172,392.938) ; v1(112.268,392.938) v1(123.825,392.938) ; U406.4@161.798,422.148 161.798,418.719 162.814,417.703 v1(167.132,417.703)
  Bottom Layer w0.3: v1(106.172,392.938) v1(112.268,392.938) ; v1(123.825,392.938) 130.048,392.938 132.842,395.732 132.842,405.638 134.366,407.162 164.338,407.162 166.497,409.321 166.497,417.068 v1(167.132,417.703)
NetU301_64: U301.64 U406.7 | length 88.4
  Top Layer w0.3: U301.64@102.484,396.328 102.484,394.975 102.997,394.462 v1(106.172,394.462) ; v1(112.268,394.462) v1(123.825,394.462) ; v1(165.608,419.481) U406.7@165.608,422.148
  Bottom Layer w0.3: v1(106.172,394.462) v1(112.268,394.462) ; v1(123.825,394.462) 129.54,394.462 131.953,396.875 131.953,406.019 133.985,408.051 163.322,408.051 165.608,410.337 v1(165.608,419.481)
NetU404_3: U404.3 U405.2 U406.17 | length 37
  Top Layer w0.5: U404.3@138.68,441.253 138.68,442.464 138.938,442.722 145.923,442.722 146.3,442.345 U405.2@146.3,441.253 ; v1(146.05,438.277) 150.114,438.277 153.035,435.356 160.655,435.356 161.798,434.213 U406.17@161.798,432.048
  Bottom Layer w0.5: v1(142.24,442.722) 142.24,440.055 142.875,439.42 144.907,439.42 v1(146.05,438.277)
NetU406_13: U406.13 U409.3 U410.2 | length 30.8
  Top Layer w0.5: U406.13@166.878,432.048 166.878,433.959 v1(169.418,436.499) ; U409.3@174.24,441.253 174.24,442.845 174.625,443.23 181.356,443.23 181.987,442.599 U410.2@181.987,441.38
  Bottom Layer w0.5: v1(169.418,436.499) 169.418,441.198 171.45,443.23 v1(178.181,443.23)
NetU406_15: U406.15 U407.3 U408.2 | length 22.7
  Top Layer w0.5: U407.3@156.46,441.253 156.46,442.464 156.718,442.722 163.703,442.722 164.08,442.345 U408.2@164.08,441.253 ; v1(164.084,436.118) 164.211,436.118 164.338,435.991 U406.15@164.338,432.048
  Bottom Layer w0.5: v1(160.147,442.722) 160.147,440.055 v1(164.084,436.118)
pads on no net: DC500.1 DC500.5 DC500.7 DC500.8 DC500.10 DC500.24 DC501.1 DC501.5 DC501.7 DC501.8 DC501.9 DC501.10 DC501.11 DC501.24 DC502.1 DC502.5 DC502.7 DC502.8 DC502.10 DC502.11 DC502.24 IPM400.29 IPM400.30 U100.2 U100.3 U100.6 U100.8 U100.9 U100.10 U100.11 U100.12 U100.13 U100.14 U100.24 U100.27 U100.28 U301.2 U301.3 U301.21 U301.22 U301.23 U301.24 U301.27 U301.28 U301.29 U301.30 U301.35 U301.36 U301.37 U301.40 U301.44 U301.45 U301.47 U301.48 U301.50 U301.51 U301.52 U301.53 U301.54 U301.55 U403.1 U403.4 U403.7 U404.1 U404.4 U404.7 U405.1 U405.4 U405.7 U406.8 U406.9 U406.11 U406.12 U407.1 U407.4 U407.7 U408.1 U408.4 U408.7 U409.1 U409.4 U409.7 U410.1 U410.4 U410.7 U500.5 U500.6 U500.7

## Polygon pours and split planes (outlines as drawn)
GND_ANA on Top Layer "GND_ANA_POUR" (solid, remove dead copper, pour order 1002): 135.001,370.967 185.039,370.967 188.341,374.65 188.341,420.624 195,427.274 235,427.274 237.5,429.786 237.5,469.987 235,472.5 217.5,472.5 215,469.987 215,434.811 212.5,432.299 187.452,432.308 182.5,427.274 164.846,409.575 154.051,409.575 149.225,404.876 131.826,404.876 129.921,402.971 130,377.022
GND_ANA on Top Layer "GND_ANA_POLY_2" (solid, remove dead copper, pour order 1001): 86.741,468.122 96.901,468.122 97.155,468.122 99.06,466.217 99.187,466.09 99.187,447.167 99.187,444.246 103.505,439.928 117.602,439.928 120.904,439.928 125.095,435.737 125.476,435.356 125.476,422.656 125.476,408.559 124.841,407.924 124.333,407.416 103.251,407.416 102.87,407.416 101.727,408.559 101.6,408.686 101.6,416.814 101.6,417.068 102.87,418.338 112.395,418.338 113.538,419.481 113.665,419.608 113.665,429.387 110.617,432.435 109.855,433.197 109.093,433.959 89.789,433.959 89.662,433.959 87.249,436.372 86.233,437.388 86.233,466.979 86.233,467.614 86.741,468.122
GND_DIG on Bottom Layer "GND_DIG_POLY" (solid, remove dead copper, pour order 1000): 38.227,371.729 32.5,377.5 32.5,392.5 35,395 42.5,395 45,392.5 75,392.5 77.47,394.97 77.47,407.162 83.312,413.004 83.312,431.292 86.995,434.975 125.095,434.975 130.048,430.022 130.048,374.904 126.873,371.729

## Other copper
Top Layer:
  pour cut-out: 224.917,469.392 229.362,469.392 229.362,473.202 224.917,473.202
  pour cut-out: 215.773,469.392 220.218,469.392 220.218,473.202 215.773,473.202
  text "+5V_DRV" at 82.804,463.169 h0.7 r90
  text "+15V_DRV" at 79.248,443.357 h0.7 r90
  text "+5V_DIG" at 73.279,426.847 h0.7 r90
  text "+15V_ANA" at 74.168,409.956 h0.7 r90
  text "-15V_ANA" at 73.025,385.826 h0.7 r90

## Silkscreen, mask and mechanical layers (free items; w line width, h text height)
Top Overlay:
  lines w0.254: 26.797,373.126 28.194,371.729 196.215,371.729 199.644,375.158 199.644,424.561 201.422,426.339 235.077,426.339 238.252,429.514 238.252,472.313 236.474,474.091 217.551,474.091 215.392,471.932 215.392,435.356 213.36,433.324 203.581,433.324 200.279,436.626 200.279,441.706 198.12,443.865 132.969,443.865 127.889,448.945 101.981,448.945 99.949,450.977 99.949,467.36 97.536,469.773 87.122,469.773 85.217,467.868 85.217,445.643 79.629,440.055 47.498,440.055 45.593,438.15 45.593,399.542 40.64,394.589 27.813,394.589 26.797,393.573 26.797,373.126
Top Solder:
  text "W" at 237.998,523.24 h3
  text "U" at 220.599,523.113 h3
  text "V" at 229.362,522.986 h3
  text "HV1" at 28.448,519.303 h3
  text "HV2" at 27.813,507.873 h3
  text "DC+" at 92.202,490.347 h3
  text "DC-" at 55.118,480.06 h3
  text "+24V" at 26.67,473.075 h3
  text "PWM_UP" at 214.122,458.089 h1.52
  text "PWM_UN" at 214.122,453.771 h1.52
  text "PWM_VP" at 213.995,449.199 h1.52
  text "PWM_VN" at 213.995,444.881 h1.52
  text "PWM_WP" at 213.868,440.436 h1.52
  text "PWM_WN" at 213.868,435.864 h1.52
  text "PU" at 120.904,433.197 h1.52
  text "FAULT" at 119.126,430.784 h1.52
  text "STATE" at 82.804,374.142 h1.52 r90
  text "FAULT" at 87.757,374.142 h1.52 r90
  text "STATUS" at 92.964,373.888 h1.52 r90
  text "ERROR" at 97.79,373.888 h1.52 r90
Drill Guide:
  text ".Legend" at 325.882,472.059 h1.52
Board:
  lines w0.254: 25.019,370.078 25.019,532.511 282.448,532.511 282.448,370.078 25.019,370.078
Mechanical 16:
  drawing of 1890 lines, arcs and shapes, not listed
  text "1" at 32.927,561.721 h1.78
  text "2" at 99.492,561.721 h1.78
  text "3" at 166.023,561.721 h1.78
  text "4" at 232.74,561.721 h1.78
  text "5" at 299.39,561.721 h1.78
  text "6" at 365.938,561.721 h1.78
  text "7" at 432.74,561.721 h1.78
  text "8" at 499.288,561.721 h1.78
  text "9" at 565.836,561.721 h1.78
  text "10" at 632.13,561.721 h1.78
  text "11" at 699.186,561.721 h1.78
  text "12" at 765.734,561.721 h1.78
  text "A" at 3.04,493.345 h1.78
  text "A" at 795.52,493.345 h1.78
  text "D" at 91.873,379.05 h1.78
  text "B" at 3.209,351.714 h1.78
  text "B" at 795.689,351.714 h1.78
  text "C" at 3.226,210.236 h1.78
  text "C" at 795.706,210.236 h1.78
  text "D" at 3.226,68.758 h1.78
  text "ENGINEER:" at 679.45,35.56 h1.14
  text "TITLE:" at 717.55,35.56 h1.14
  text "PCB DESIGNER:" at 679.45,28.067 h1.14
  text "DATE:" at 679.45,20.32 h1.14
  text "PART NO.:" at 717.55,20.32 h1.14
  text "REV:" at 770.89,20.32 h1.14
  text "Altium Limited" at 646.43,17.78 h1.78
  text ".PRINT_DATE" at 680.72,17.272 h1.78
  text "12a Rodborough Rd" at 646.43,15.24 h1.78
  text "Frenchs Forest" at 646.43,12.7 h1.78
  text "FILE NAME:" at 679.45,12.7 h1.14
  text "DWG NO:" at 717.55,12.7 h1.14
  text "SCALE:" at 770.89,12.7 h1.14
  text "NSW 2086" at 646.43,10.16 h1.78
  text ".PCB_FILE_NAME_NO_PATH" at 680.72,9.652 h1.78
  text "1" at 32.927,2.921 h1.78
  text "2" at 99.492,2.921 h1.78
  text "3" at 166.023,2.921 h1.78
  text "4" at 232.74,2.921 h1.78
  text "5" at 299.39,2.921 h1.78
  text "6" at 365.938,2.921 h1.78
  text "7" at 432.74,2.921 h1.78
  text "8" at 499.288,2.921 h1.78
  text "9" at 565.836,2.921 h1.78
  text "10" at 632.13,2.921 h1.78
  text "11" at 699.186,2.921 h1.78
  text "12" at 765.734,2.921 h1.78

## Dimensions
282.5,370 to 25,370 on Dimension
282.5,370 to 282.5,532.5 on Dimension

## Text inside footprints (layer, text, board x,y; h text height)
C500: Top Overlay "+" at 62.374,417.615 h1.5 r270
C504: Top Overlay "+" at 62.374,404.943 h1.5 r270
C506: Top Overlay "+" at 62.628,428.847 h1.5 r270
C508: Top Overlay "+" at 26.049,445.528 h1.5
C509: Top Overlay "+" at 62.75,440.351 h1.5 r270
C513: Top Overlay "+" at 73.799,461.024 h1.5 r270
C517: Top Overlay "+" at 74.029,462.746 h1.5 r90